# EAGLE board MainBoard 10-11 ver2 (EAGLE 5.10)
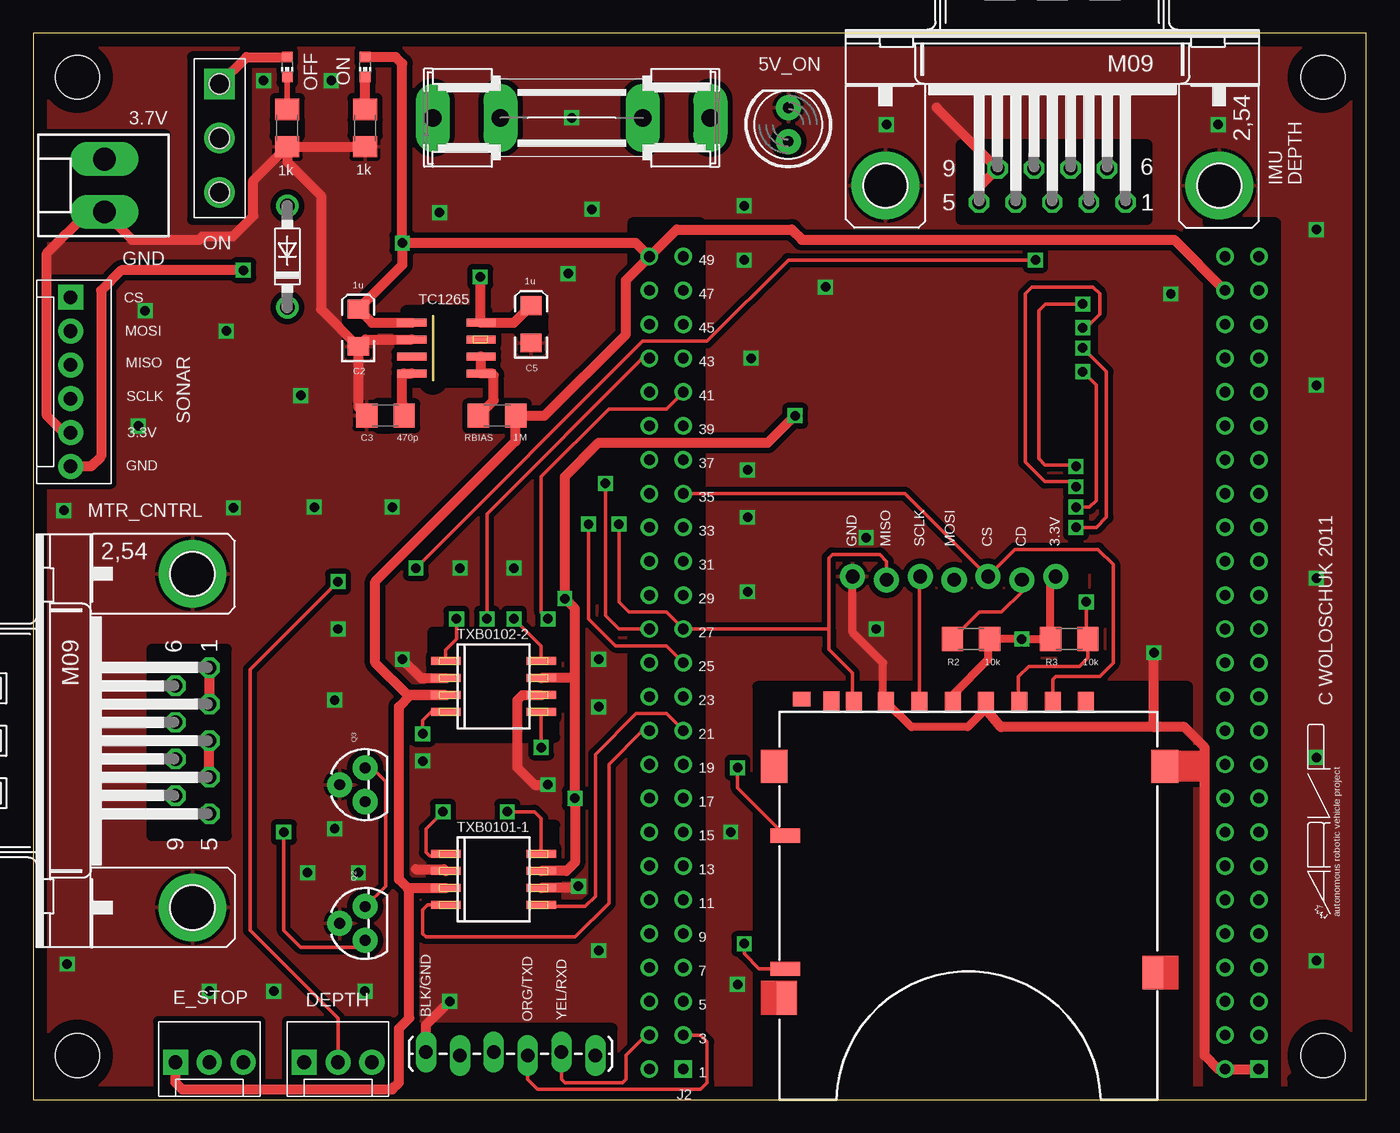
[diagram p0: board, top side]
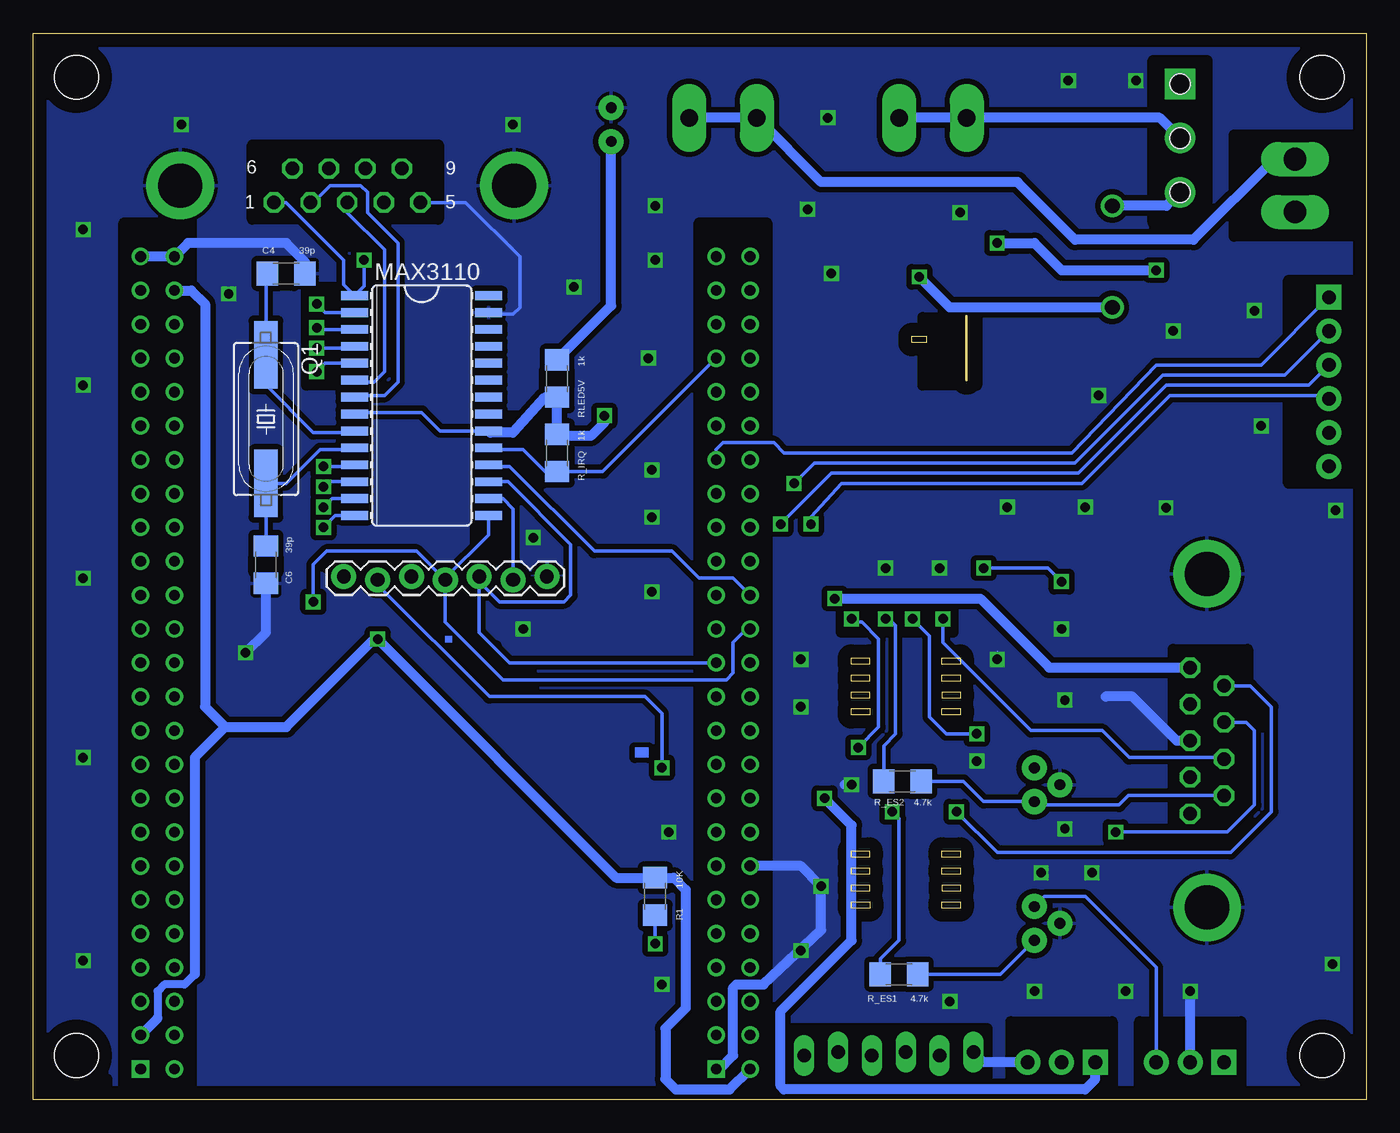
[diagram p1: board, bottom side, seen from below]

Size 100 x 80 mm. Coordinates in mm from the lower left corner, seen from the top.
Outline: 0,0 100,0 100,80 0,80 0,0
Copper layers (1*16): Top 0.035mm / dielectric 1.5mm / Bottom 0.035mm
Design rules "default *": minimum track width 10mil, minimum drill 28mil, track to track 8mil, track to pad 8mil, pad to pad 8mil, via to via 8mil, smd to smd 8mil, copper to edge 40mil, drill to drill 8mil, minimum pad ring 10mil, minimum via ring 8mil, stop-mask expansion 4mil, vias tented up to drill 28mil, thermal gap 10mil
tRestrict: area 30,12.7 to 39.1,20.6; area 30,27.2 to 39.1,35.1; area 0.3,46.2 to 5.8,61.5; area 9.4,0.3 to 17,5.8; area 19,0.3 to 26.7,5.8; area 28.7,1.8 to 43.4,5.3; area 11.9,66 to 16,78.2; area 0,64.8 to 9.9,72.4; area 69.6,66 to 83.6,71.6; area 8.9,19.8 to 14.5,33.8; area 45,0 to 50,65.8; area 88.1,0 to 93.2,65.8; 50 more areas
bRestrict: area 0.3,46.2 to 5.8,61.5; area 9.4,0.3 to 17,5.8; area 19,0.3 to 26.7,5.8; area 28.4,1.8 to 43.2,5.3; area 11.9,65.8 to 16,78; area 0,64.8 to 9.9,72.4; area 69.6,66 to 83.6,71.6; area 8.9,19.8 to 14.5,33.8; area 45,0 to 50,65.8; area 88.1,0 to 93.2,65.8; area 61.7,46.2 to 64.3,51.3; area 5.8,54.1 to 7.1,55.6; 33 more areas

## Footprints (pad centres in the part's own frame; a part is rotated, then mirrored left to right if it is on the bottom)
EIA3216 = smd 1.4 x 1.6: A 1.4,0; C -1.4,0
C1206 = smd 1.6 x 1.8: 1 -1.4,0; 2 1.4,0
DO41-7.6 = drill 1.1 pad 1.7 round: A 3.81,0; C -3.81,0
MOLEX-1X3 = drill 1.016 pad 1.88 square: 1 0,0 | drill 1.016 pad 1.88 round: 2 2.54,0; 3 5.08,0
SHK20L = drill 1.321 pad 2.54 long: 1A -10.414,0; 1B -5.334,0; 2A 10.414,0; 2B 5.334,0
M09HP = drill 1.016 octagon: 1 -5.486,1.27; 2 -2.743,1.27; 3 0,1.27; 4 2.743,1.27; 5 5.486,1.27; 6 -4.115,-1.27; 7 -1.372,-1.27; 8 1.372,-1.27; 9 4.115,-1.27 | drill 3.302 pad 5.08 round: G1 -12.522,0; G2 12.522,0
STAND-OFF = hole 3.302: 0,0
1X07_LOCK = drill 1.016 pad 1.88 round: 1 0,0.127; 2 2.54,-0.127; 3 5.08,0.127; 4 7.62,-0.127; 5 10.16,0.127; 6 12.7,-0.127; 7 15.24,0.127
LED5MM = drill 0.813 pad 1.88 round: A -1.27,0; K 1.27,0
CHIP-LED0603 = smd 0.8 x 0.8: A 0,-0.75; C 0,0.75
SO28L = smd 0.66 x 2.032: 1 -8.255,-5.029; 2 -6.985,-5.029; 3 -5.715,-5.029; 4 -4.445,-5.029; 5 -3.175,-5.029; 6 -1.905,-5.029; 7 -0.635,-5.029; 8 0.635,-5.029; 9 1.905,-5.029; 10 3.175,-5.029; 11 4.445,-5.029; 12 5.715,-5.029; 13 6.985,-5.029; 14 8.255,-5.029; 15 8.255,5.029; 16 6.985,5.029; 17 5.715,5.029; 18 4.445,5.029; 19 3.175,5.029; 20 1.905,5.029; 21 0.635,5.029; 22 -0.635,5.029; 23 -1.905,5.029; 24 -3.175,5.029; 25 -4.445,5.029; 26 -5.715,5.029; 27 -6.985,5.029; 28 -8.255,5.029
MOD5270 = drill 0.8 square: J1[1] -23.368,35.052; J2[1] 19.812,35.052 | drill 0.8 round: J1[2] -20.828,35.052; J1[3] -23.368,32.512; J1[4] -20.828,32.512; J1[5] -23.368,29.972; J1[6] -20.828,29.972; J1[7] -23.368,27.432; J1[8] -20.828,27.432; J1[9] -23.368,24.892; J1[10] -20.828,24.892; J1[11] -23.368,22.352; J1[12] -20.828,22.352; J1[13] -23.368,19.812; J1[14] -20.828,19.812; J1[15] -23.368,17.272; J1[16] -20.828,17.272; J1[17] -23.368,14.732; J1[18] -20.828,14.732; J1[19] -23.368,12.192; J1[20] -20.828,12.192; J1[21] -23.368,9.652; J1[22] -20.828,9.652; J1[23] -23.368,7.112; J1[24] -20.828,7.112; J1[25] -23.368,4.572; J1[26] -20.828,4.572; J1[27] -23.368,2.032; J1[28] -20.828,2.032; J1[29] -23.368,-0.508; J1[30] -20.828,-0.508; J1[31] -23.368,-3.048; J1[32] -20.828,-3.048; J1[33] -23.368,-5.588; J1[34] -20.828,-5.588; J1[35] -23.368,-8.128; J1[36] -20.828,-8.128; J1[37] -23.368,-10.668; J1[38] -20.828,-10.668; J1[39] -23.368,-13.208; J1[40] -20.828,-13.208; J1[41] -23.368,-15.748; J1[42] -20.828,-15.748; J1[43] -23.368,-18.288; J1[44] -20.828,-18.288; J1[45] -23.368,-20.828; J1[46] -20.828,-20.828; J1[47] -23.368,-23.368; J1[48] -20.828,-23.368; J1[49] -23.368,-25.908; J1[50] -20.828,-25.908; J2[2] 22.352,35.052; J2[3] 19.812,32.512; J2[4] 22.352,32.512; J2[5] 19.812,29.972; J2[6] 22.352,29.972; J2[7] 19.812,27.432; J2[8] 22.352,27.432; J2[9] 19.812,24.892; J2[10] 22.352,24.892; J2[11] 19.812,22.352; J2[12] 22.352,22.352; J2[13] 19.812,19.812; J2[14] 22.352,19.812; J2[15] 19.812,17.272; J2[16] 22.352,17.272; J2[17] 19.812,14.732; J2[18] 22.352,14.732; J2[19] 19.812,12.192; J2[20] 22.352,12.192; J2[21] 19.812,9.652; J2[22] 22.352,9.652; J2[23] 19.812,7.112; J2[24] 22.352,7.112; J2[25] 19.812,4.572; J2[26] 22.352,4.572; J2[27] 19.812,2.032; J2[28] 22.352,2.032; J2[29] 19.812,-0.508; J2[30] 22.352,-0.508; J2[31] 19.812,-3.048; J2[32] 22.352,-3.048; J2[33] 19.812,-5.588; J2[34] 22.352,-5.588; J2[35] 19.812,-8.128; J2[36] 22.352,-8.128; J2[37] 19.812,-10.668; J2[38] 22.352,-10.668; J2[39] 19.812,-13.208; J2[40] 22.352,-13.208; J2[41] 19.812,-15.748; J2[42] 22.352,-15.748; J2[43] 19.812,-18.288; J2[44] 22.352,-18.288; J2[45] 19.812,-20.828; J2[46] 22.352,-20.828; J2[47] 19.812,-23.368; J2[48] 22.352,-23.368; J2[49] 19.812,-25.908; J2[50] 22.352,-25.908
1X06_LOCK_LONGPADS = drill 1.016 long: 1 0,0; 2 2.54,-0.254; 3 5.08,0; 4 7.62,-0.254; 5 10.16,0; 6 12.7,-0.254
SM49 = smd 5.08 x 1.778: 1 -4.826,0; 2 4.826,0
TO-92 = drill 0.813 pad 1.88 round: 1 -1.27,0; 2 0,1.905; 3 1.27,0
1206 = smd 1.6 x 1.8: 1 -1.4,0; 2 1.4,0
SWITCH-3PIN-5.47 = drill 1.524 square: P$1 0,0 | drill 1.524 round: P$2 0,-4.064; P$3 0,-8.128 | hole 1.524: 0,0; 0,-4.064; 0,-8.128
MOLEX-1X6 = drill 1.016 pad 1.88 square: 1 0,0 | drill 1.016 pad 1.88 round: 2 2.54,0; 3 5.08,0; 4 7.62,0; 5 10.16,0; 6 12.7,0
SO-08 = smd 0.6 x 2.2: 1 -1.905,-2.6; 2 -0.635,-2.6; 3 0.635,-2.6; 4 1.905,-2.6; 5 1.905,2.6; 6 0.635,2.6; 7 -0.635,2.6; 8 -1.905,2.6
SOP-08 = smd 0.6 x 2.2: 1 -1.905,-3.6; 2 -0.635,-3.6; 3 0.635,-3.6; 4 1.905,-3.6; 5 1.905,3.575; 6 0.635,3.575; 7 -0.635,3.575; 8 -1.905,3.575
SD_CARD = smd 1.2 x 1.5: 1 6.88,12.07; 2 4.38,12.07; 3 1.88,12.07; 4 -0.62,12.07; 5 -3.12,12.07; 6 -5.62,12.07; 7 -8.04,12.07; 8 -9.728,12.09; 9 9.38,12.07 | smd 1.5 x 2.5: 12 -13.1,-10.18; 13 14.402,-8.255 | smd 2 x 2.5: 14 -14,7.22; 15 15.3,7.22 | smd 2.184 x 1.067: CD -13.18,2.02; WP -13.18,-7.98 | smd 1.3 x 1.1: SW -11.938,12.268
KK-156-2 = drill 1.7 pad 2.184 long: 1 -1.98,0; 2 1.98,0

## Placement (x,y rotation side)
C2  1u  [EIA3216]  24.38,57.91 90 top
C3  470p  [C1206]  26.42,51.31 180 top
C4  39p  [C1206]  81.03,61.98 0 bottom
C5  1u  [EIA3216]  37.34,58.17 90 top
C6  39p  [C1206]  82.55,40.13 270 bottom
D1  1N5817FSCT-ND  [DO41-7.6]  19.05,63.25 90 top
DEPTH  [MOLEX-1X3]  20.32,2.79 0 top
E_STOP  [MOLEX-1X3]  10.67,2.79 0 top
F1  1A  [SHK20L]  40.39,73.66 180 top
IMU/DEPTH  [M09HP]  76.45,68.58 180 top
JP2  STAND-OFF  [STAND-OFF]  96.77,76.71 0 top
JP3  STAND-OFF  [STAND-OFF]  3.3,76.71 0 top
JP4  STAND-OFF  [STAND-OFF]  3.3,3.3 0 top
JP5  STAND-OFF  [STAND-OFF]  96.77,3.3 0 top
JP_SD  [1X07_LOCK]  76.71,39.12 0 bottom
LED5V  5mm  [LED5MM]  56.64,73.15 90 top
LEDOFF  [CHIP-LED0603]  19.05,77.47 180 top
LEDON  [CHIP-LED0603]  24.89,77.47 180 top
MAX3110  MAX3110  [SO28L]  70.87,52.07 270 bottom
MOD5270  MOD5270  [MOD5270]  68.58,37.34 180 top
MTRCONTR  [M09HP]  11.94,26.92 270 top
PROG_HEADER  [1X06_LOCK_LONGPADS]  29.46,3.56 0 top
Q1  3.6864MHz  [SM49]  82.55,51.05 270 bottom
Q2  MOSFET-NCHANNELPTH  [TO-92]  24.89,13.21 90 top
Q3  MOSFET-NCHANNELPTH  [TO-92]  24.89,23.62 90 top
R1  10k  [1206]  53.34,15.24 90 bottom
R2  10k  [1206]  70.36,34.54 0 top
R3  10k  [1206]  77.72,34.54 180 top
R_ES1  4.7k  [1206]  35.05,9.4 0 bottom
R_ES2  4.7k  [1206]  34.8,23.88 0 bottom
R_IRQ  1k  [1206]  60.71,48.51 270 bottom
RBIAS  1M  [1206]  34.8,51.31 0 top
RLED5V  1k  [1206]  60.71,54.1 270 bottom
RLEDOFF  1k  [1206]  19.05,72.9 270 top
RLEDON  1k  [1206]  24.89,72.9 270 top
S1  [SWITCH-3PIN-5.47]  13.97,76.2 0 top
SONAR  [MOLEX-1X6]  2.79,60.2 270 top
TC1265  TC1265  [SO-08]  30.99,56.39 270 top
TXB0101-1  TXB0102  [SOP-08]  34.54,16.51 270 top
TXB0102-2  TXB0102  [SOP-08]  34.54,30.99 270 top
U$1  [ARVP]  98.04,13.72 90 top
U$2  SD_CARD  [SD_CARD]  69.6,17.78 0 top
X3  [KK-156-2]  5.33,68.58 90 top

## Library data of the parts
C2 C5 DEPTH E_STOP JP2-JP5 JP_SD LED5V PROG_HEADER Q2 Q3 R1-R3 R_ES1 R_ES2 R_IRQ RBIAS RLED5V RLEDOFF RLEDON SONAR = SparkFun
C3 C4 C6 = rcl
D1 = diode
F1 = fuse
IMU/DEPTH MTRCONTR = con-subd
LEDOFF LEDON = led
MAX3110 MOD5270 S1 TC1265 TXB0101-1 TXB0102-2 U$1 U$2 = ARVP
Q1 = crystal
X3 = con-molex

## Nets
3.3V: C2.A E_STOP.1 JP_SD.1 LEDON.A MOD5270.J1[3] MOD5270.J1[48] MOD5270.J2[2] MOD5270.J2[50] R1.2 R2.2 R3.2 RBIAS.2 SONAR.6 TC1265.1 TXB0101-1.3 TXB0102-2.3 U$2.4
3.7V: F1.1A X3.2
3.7V_AD: C5.A D1.C TC1265.8
5V: DEPTH.1 MAX3110.8 MAX3110.20 MTRCONTR.1 MTRCONTR.2 R_IRQ.1 RLED5V.2 TXB0101-1.7 TXB0102-2.7
CD: JP_SD.2 R2.1 U$2.CD
CS(ADC): MOD5270.J2[37] SONAR.1
CS(MAX3110): MAX3110.18 MOD5270.J2[30]
CS(SD): JP_SD.3 MOD5270.J2[35] U$2.1
DEPTHI/P: DEPTH.2 IMU/DEPTH.1 MAX3110.1
E_STOP: E_STOP.3 Q2.3 Q3.3
GND: C2.C C3.2 C4.2 C5.C C6.2 DEPTH.3 E_STOP.2 IMU/DEPTH.5 IMU/DEPTH.9 IMU/DEPTH.G1 IMU/DEPTH.G2 JP_SD.7 LED5V.K MAX3110.27 MOD5270.J1[1] MOD5270.J1[2] MOD5270.J1[49] MOD5270.J1[50] MOD5270.J2[1] MOD5270.J2[14] MTRCONTR.3 MTRCONTR.4 MTRCONTR.G1 MTRCONTR.G2 PROG_HEADER.1 Q2.2 Q3.2 RLEDOFF.2 RLEDON.2 SONAR.5 TC1265.2 TXB0101-1.2 TXB0101-1.6 TXB0102-2.2 TXB0102-2.6 U$2.3 U$2.6 X3.1
IMU_RX_RS232: IMU/DEPTH.2 MAX3110.7
IMU_TX_RS232: IMU/DEPTH.3 MAX3110.6
IRQ1: MAX3110.19 MOD5270.J2[43] R_IRQ.2
MISO: JP_SD.6 MAX3110.16 MOD5270.J2[27] SONAR.3 U$2.7
MOSI: JP_SD.4 MAX3110.15 MOD5270.J2[28] R3.1 SONAR.2 U$2.2
N$1: F1.2A S1.P$2
N$2: MAX3110.4 MAX3110.14
N$3: MOD5270.J2[46]
N$4: R1.1 U$2.WP
N$5: D1.A S1.P$3
N$6: MAX3110.3 MAX3110.12
N$7: MAX3110.5 MAX3110.13
N$8: LEDON.C RLEDON.1
N$9: MAX3110.2 MAX3110.11
N$10: C3.1 TC1265.4
N$11: LEDOFF.C RLEDOFF.1
N$13: LEDOFF.A S1.P$1
N$14: C6.1 MAX3110.10 Q1.2
N$15: LED5V.A RLED5V.1
N$16: RBIAS.1 TC1265.5 TC1265.6
N$17: C4.1 MAX3110.9 Q1.1
S1-1: MTRCONTR.6 TXB0101-1.1
S1-2: MTRCONTR.8 TXB0102-2.1
S2-1: R_ES1.1 TXB0101-1.8
S2-1-ES: MTRCONTR.7 Q2.1 R_ES1.2
S2-2: R_ES2.1 TXB0102-2.8
S2-2-ES: MTRCONTR.9 Q3.1 R_ES2.2
SCLK: JP_SD.5 MAX3110.17 MOD5270.J2[25] SONAR.4 U$2.5
U0_RXD: MOD5270.J2[3] PROG_HEADER.4
U0_TXD: MOD5270.J2[4] PROG_HEADER.5
U1_MCRX: MOD5270.J2[21] TXB0101-1.5
U1_MCTX: MOD5270.J2[22] TXB0101-1.4
U2_MCRX: MOD5270.J2[41] TXB0102-2.5
U2_MCTX: MOD5270.J2[44] TXB0102-2.4

## Tracks (layer width: path | path; a pad name or v marks a point on that pad's centre or on a via)
3.3V  (via drill 0.71)
  Top 0.254: 68.98,30.37 U$2.4 | R2.2 71.63,34.41
  Top 0.61: 76.32,38.86 R3.2 v74.17,34.54 R2.2 | 68.98,30.37 71.63,33.02 71.63,34.41
  Top 0.762: TC1265.1 25.4,58.29 C2.A 27.69,62.61 v27.69,64.26 | v15.75,62.23 6.6,62.23 5.08,60.71 5.08,48.26 4.32,47.5 SONAR.6 | LEDON.A 27.19,78.22 27.69,77.72 v27.69,64.26 | 76.32,38.86 JP_SD.1 | v27.69,64.26 45.21,64.26 MOD5270.J2[50] | 28.07,15.88 27.43,16.51 27.43,29.46 28.32,30.35 TXB0102-2.3 28.07,30.35 25.65,32.77 25.65,38.86 36.2,49.41 RBIAS.2 38.35,51.31 44.45,57.4 44.45,61.47 MOD5270.J2[50] | 28.07,15.88 TXB0101-1.3 | 28.07,15.88 28.19,15.75 28.19,6.1 27.43,5.33 27.43,1.27 26.92,0.76 11.18,0.76 10.67,1.27 E_STOP.1 | MOD5270.J2[50] 48.26,65.28 56.9,65.28 57.66,64.52 85.6,64.52 MOD5270.J1[48]
  Bottom 0.61: 90.68,6.1 90.68,8.13 90.17,8.64 88.65,8.64 87.88,9.4
  Bottom 0.762: v15.75,62.23 22.86,62.23 24.89,64.26 v27.69,64.26 | 90.68,6.1 MOD5270.J1[3] | 87.88,9.4 87.88,25.65 85.6,27.94 | 85.6,27.94 81.03,27.94 74.42,34.54 v74.17,34.54 56.26,16.64 R1.2 51.95,16.64 51.05,15.75 51.05,6.86 52.58,5.33 52.58,1.52 51.82,0.76 47.75,0.76 MOD5270.J2[2] | 85.6,27.94 87.12,29.46 87.12,59.69 88.14,60.71 MOD5270.J1[48]
3.7V
  Bottom 0.762: X3.2 6.91,70.56 12.95,64.52 21.84,64.52 26.16,68.83 40.89,68.83 45.72,73.66 F1.1A
3.7V_AD  (via drill 0.71)
  Top 0.762: v33.53,61.72 33.53,58.35 TC1265.8 36.06,58.29 C5.A
  Bottom 0.762: D1.C 31.24,59.44 v33.53,61.72
5V  (via drill 0.71)
  Top 0.762: v57.15,51.31 55.12,49.28 42.42,49.28 39.88,46.74 v39.88,37.59 40.64,36.83 40.64,31.75 | MTRCONTR.1 MTRCONTR.2 | TXB0102-2.7 40.51,31.62 40.64,31.75 | TXB0101-1.7 40.01,17.14 40.64,17.78 v40.64,22.61 40.64,31.75
  Bottom 0.254: RLED5V.2 61.6,52.7 | 65.71,50.04 MAX3110.20 69.47,50.16 70.87,51.56 75.77,51.56 MAX3110.8
  Bottom 0.762: 61.6,52.7 64.01,50.04 65.71,50.04 | RLED5V.2 R_IRQ.1 60.58,49.78 58.17,49.78 57.15,50.8 v57.15,51.31 | MTRCONTR.1 23.77,32.41 28.96,37.59 v39.88,37.59 | v40.64,22.61 38.61,20.57 38.61,11.94 43.94,6.6 43.94,1.02 43.69,0.76 21.08,0.76 20.32,1.52 DEPTH.1
CD  (via drill 0.71)
  Top 0.254: JP_SD.2 74.17,38.1 72.64,36.58 70.99,36.58 R2.1 | U$2.CD 52.83,23.38 v52.83,24.89
  Bottom 0.254: v52.83,24.89 52.83,28.96 54.1,30.23 65.79,30.23 74.17,38.61 JP_SD.2
CS(ADC)
  Bottom 0.254: SONAR.1 7.87,55.12 15.75,55.12 22.1,48.51 43.69,48.51 44.45,49.28 48.26,49.28 48.77,48.77 MOD5270.J2[37]
CS(MAX3110)
  Bottom 0.254: MOD5270.J2[30] 47.5,39.12 50.04,39.12 52.07,41.15 57.91,41.15 64.26,47.5 65.71,47.5 MAX3110.18
CS(SD)
  Top 0.254: MOD5270.J2[35] 65.41,45.47 JP_SD.3 73.66,41.27 79.88,41.27 81.03,40.13 81.03,32.77 80.01,31.75 76.71,31.75 76.48,31.52 U$2.1
DEPTHI/P  (via drill 0.71)
  Top 0.254: v75.18,62.99 56.64,62.99 50.55,56.9 45.72,56.9 v28.7,39.88 | v22.86,38.86 16.26,32.26 16.26,12.7 22.86,6.1 DEPTH.2
  Bottom 0.254: IMU/DEPTH.1 81.03,67.31 76.71,62.99 76.71,61.14 MAX3110.1 75.18,61.04 v75.18,62.99 | v28.7,39.88 23.88,39.88 v22.86,38.86
E_STOP
  Top 0.254: Q3.3 25.4,24.89 26.42,23.88 26.42,16 Q2.3
  Bottom 0.254: Q2.3 24.13,15.24 21.08,15.24 15.75,9.91 E_STOP.3
GND  (via drill 0.71)
  Top 0.254: U$2.6 63.75,30.07
  Top 0.406: C2.C 24.89,57.02
  Top 0.61: JP_SD.7 61.47,35.05 63.75,32.77 63.75,30.07 | U$2.3 71.48,29.31 70.1,27.94 65.89,27.94 U$2.6
  Top 0.762: RLEDOFF.2 RLEDON.2 | RLEDOFF.2 16.51,68.96 16.51,66.29 14.99,64.77 12.7,64.77 12.45,64.52 7.42,64.52 X3.1 4.12,66.6 1.02,63.5 1.02,51.31 2.29,50.04 SONAR.5 | 24.89,57.02 TC1265.2 | RLEDOFF.2 19.05,70.36 21.59,67.82 21.59,59.31 C2.C 24.38,51.94 C3.2 | IMU/DEPTH.5 70.97,68.48 IMU/DEPTH.9 67.77,74.42 | TXB0102-2.2 29.08,31.62 v27.69,33.02 | 71.48,29.31 72.59,27.94 84.07,27.94 84.2,28.07 | v84.07,33.53 84.07,28.19 84.2,28.07 | 84.2,28.07 84.33,27.94 86.36,27.94 87.88,26.42 87.88,3.3 88.9,2.29 MOD5270.J1[2] MOD5270.J1[1] | TXB0102-2.6 36.7,30.35 36.32,29.97 36.32,24.89 37.59,23.62 v38.61,23.62 | TXB0101-1.6 40.77,15.88 v40.89,16 | TXB0101-1.2 30.82,17.27 28.7,17.27 | MTRCONTR.4 MTRCONTR.3 | PROG_HEADER.1 29.46,5.59 v31.24,7.37
  Bottom 0.254: IMU/DEPTH.5 67.56,67.31 63.5,63.25 63.5,59.44 64.01,58.93 65.71,58.93 MAX3110.27 | C4.2 79.63,62.86 | 22.43,24.18 Q3.2 | v27.69,33.02 27.69,33.53
  Bottom 0.762: 79.63,62.86 81.03,64.26 88.39,64.26 MOD5270.J1[50] MOD5270.J1[49] | C6.2 82.55,35.05 v84.07,33.53 | v38.61,23.62 39.12,23.62 | DEPTH.3 28.7,2.79 PROG_HEADER.1 | MOD5270.J2[1] 48.51,2.29 47.5,3.3 47.5,8.38 47.24,8.64 45.21,8.64 40.89,12.7 v40.89,16 42.42,17.53 MOD5270.J2[14] | MTRCONTR.3 14.22,26.92 17.53,30.23 19.56,30.23 | E_STOP.2 v13.21,8.13
  other vias: 53.59,38.1 8.38,59.18 14.48,57.66 29.21,25.4 42.42,33.02 42.42,29.46 22.61,29.97 24.38,17.02 20.57,17.02 22.61,20.32 2.54,10.16 18.03,8.13 24.89,8.13 42.42,11.18 7.87,50.55 20.07,52.83 2.29,44.2 15.01,44.4 26.92,44.45 30.48,66.55 41.91,66.8 53.34,67.06 53.34,62.99 53.85,55.63 59.44,60.96 53.59,43.69 53.59,47.24 96.27,10.41 96.27,25.65 96.27,39.12 96.27,53.59 96.27,65.28 85.34,60.45 64.01,73.15 88.9,73.15 40.39,73.66 40.13,61.98 63.25,35.31 32,39.88 36.07,39.88 22.86,35.31 62.48,42.16 21.08,44.45 22.35,76.45 17.27,76.45 52.83,8.64 52.32,20.07
  pour Top (isolate 0.406): 0,80.01 100.08,80.01 100.08,0 0,0
  pour Bottom (isolate 0.406): 0,80.01 100.08,80.01 100.08,0 0,0
IMU_RX_RS232
  Bottom 0.254: IMU/DEPTH.2 79.2,67.26 79.05,67.26 77.72,68.58 75.44,68.58 74.93,68.07 74.93,66.55 72.64,64.26 72.64,53.85 73.66,52.83 75.77,52.83 MAX3110.7
IMU_TX_RS232
  Bottom 0.254: IMU/DEPTH.3 76.45,66.55 73.66,63.75 73.66,54.61 74.42,53.85 75.77,53.85 MAX3110.6
IRQ1
  Bottom 0.254: MAX3110.19 65.71,48.77 63.25,48.77 61.59,47.11 R_IRQ.2 57.28,47.11 MOD5270.J2[43]
MISO  (via drill 0.71)
  Top 0.254: JP_SD.6 64.01,40.39 63.5,40.89 59.94,40.89 59.69,40.64 59.69,35.31 | 59.69,35.31 59.69,33.78 61.47,32 61.47,29.94 U$2.7 | 59.69,35.31 MOD5270.J2[27] 47.5,36.58 44.7,36.58 43.94,37.34 v43.94,43.18
  Bottom 0.254: SONAR.3 4.32,53.59 14.99,53.59 21.59,46.99 40.13,46.99 v43.94,43.18 | MAX3110.16 64.77,45.09 64.01,44.32 JP_SD.6
MOSI  (via drill 0.71)
  Top 0.254: U$2.2 73.91,29.91 73.91,31.75 74.68,32.51 78.49,32.51 79.12,33.15 R3.1 78.99,34.67 v78.99,37.34 | v42.93,46.23 42.93,36.32 43.94,35.31 MOD5270.J2[28]
  Bottom 0.254: SONAR.2 6.1,54.36 15.24,54.36 21.84,47.75 41.4,47.75 v42.93,46.23 | JP_SD.4 69.09,37.59 | MOD5270.J2[28] 46.48,35.31 47.5,34.29 47.5,32 48.01,31.5 64.77,31.5 69.09,35.81 JP_SD.4 | v78.99,37.34 78.99,40.13 77.98,41.15 71.25,41.15 JP_SD.4 | JP_SD.4 69.09,39.12 65.84,42.37 MAX3110.15
N$1
  Bottom 0.762: S1.P$2 15.49,73.66 F1.2A 35.31,73.66
N$2  (via drill 0.71)
  Top 0.254: v78.74,56.39 80.52,54.61 80.52,43.69 79.76,42.93 v78.23,42.93
  Bottom 0.254: MAX3110.4 76.02,56.39 v78.74,56.39 | v78.23,42.93 77.34,43.81 MAX3110.14
N$4  (via drill 0.71)
  Top 0.254: U$2.WP 54.46,9.8 53.34,10.92 v53.34,11.68
  Bottom 0.254: v53.34,11.68 R1.1
N$5
  Bottom 0.762: S1.P$3 14.99,67.06 D1.A
N$6  (via drill 0.71)
  Top 0.254: v78.74,57.91 78.99,57.91 80.01,58.93 80.01,60.45 79.5,60.96 74.93,60.96 74.42,60.45 74.42,47.83 MAX3110.12 77.85,46.35 v78.23,45.97
  Bottom 0.254: MAX3110.3 78.61,57.78 v78.74,57.91 | v78.23,45.97 77.85,46.35 MAX3110.12
N$7  (via drill 0.71)
  Top 0.254: v78.23,44.45 79.25,44.45 79.76,44.96 79.76,53.59 v78.74,54.61
  Bottom 0.254: v78.74,54.61 78.11,55.24 MAX3110.5 | MAX3110.13 77.6,45.09 v78.23,44.45
N$8
  Top 0.762: RLEDON.1 LEDON.C
N$9  (via drill 0.71)
  Top 0.254: v78.74,59.69 75.95,59.69 75.44,59.18 75.44,48.08 MAX3110.11 78.11,47.62 v78.23,47.5
  Bottom 0.254: MAX3110.2 78.11,59.05 v78.74,59.69 | v78.23,47.5 76.02,47.5 MAX3110.11
N$10
  Top 0.762: C3.1 27.69,52.2 27.69,54.36 27.81,54.48 TC1265.4
N$11
  Top 0.406: RLEDOFF.1 LEDOFF.C
N$13
  Top 0.762: S1.P$1 15.99,78.22 LEDOFF.A
N$14
  Bottom 0.254: C6.1 Q1.2 81.03,46.23 78.49,48.77 76.02,48.77 MAX3110.10
N$15
  Bottom 0.762: LED5V.A 56.64,59.57 RLED5V.1
N$16
  Top 0.762: TC1265.6 TC1265.5 34.42,54.48 34.54,54.36 34.54,52.45 RBIAS.1
N$17
  Bottom 0.254: C4.1 82.55,61.85 Q1.1 82.55,53.59 78.99,50.04 76.02,50.04 MAX3110.9
S1-1  (via drill 0.71)
  Top 0.254: v30.73,21.59 29.46,20.32 29.46,18.54 29.72,18.29 30.82,18.29 TXB0101-1.1 31.07,18.29
  Bottom 0.254: MTRCONTR.6 8.69,31.04 7.11,29.46 7.11,21.59 10.16,18.54 27.69,18.54 v30.73,21.59
S1-2  (via drill 0.71)
  Top 0.254: TXB0102-2.1 30.94,33.74 31.75,34.54 v31.75,36.07
  Bottom 0.254: 10.52,25.4 MTRCONTR.8 10.77,25.65 17.78,25.65 19.81,27.69 25.15,27.69 31.75,34.29 v31.75,36.07
S2-1  (via drill 0.71)
  Top 0.254: v35.56,21.59 37.59,21.59 38.1,21.08 38.1,18.43 TXB0101-1.8
  Bottom 0.254: R_ES1.1 36.45,10.54 35.05,11.94 35.05,21.08 v35.56,21.59
S2-1-ES  (via drill 0.71)
  Top 0.254: v18.8,20.07 18.8,12.7 20.07,11.43 24.38,11.43 Q2.1
  Bottom 0.254: MTRCONTR.7 8.99,28.3 8.38,27.69 8.38,22.1 10.41,20.07 v18.8,20.07 | R_ES1.2 27.43,9.4 Q2.1
S2-2  (via drill 0.71)
  Top 0.254: v36.07,36.07 38.1,34.04 38.1,32.91 TXB0102-2.8
  Bottom 0.254: R_ES2.1 36.2,26.54 35.31,27.43 35.31,35.56 35.81,36.07 v36.07,36.07
S2-2-ES
  Bottom 0.254: MTRCONTR.9 17.83,22.81 18.54,22.1 24.64,22.1 Q3.1 28.7,22.35 30.23,23.88 R_ES2.2
SCLK  (via drill 0.71)
  Top 0.254: U$2.5 66.48,39.17 JP_SD.5 | v41.66,43.18 41.66,36.07 43.69,34.04 47.5,34.04 MOD5270.J2[25]
  Bottom 0.254: SONAR.4 3.05,52.83 14.73,52.83 21.34,46.23 39.37,46.23 41.66,43.69 v41.66,43.18 | MAX3110.17 64.39,46.35 59.69,41.66 59.69,37.85 60.2,37.34 65.02,37.34 66.55,38.86 JP_SD.5 66.55,35.05 64.26,32.77 MOD5270.J2[25]
U0_RXD
  Top 0.254: PROG_HEADER.4 37.08,1.52 37.85,0.76 50.04,0.76 50.55,1.27 50.55,4.32 50.04,4.83 MOD5270.J2[3]
U0_TXD
  Top 0.254: MOD5270.J2[4] 45.97,4.83 44.45,3.3 44.45,1.52 44.2,1.27 39.88,1.27 39.62,1.52 PROG_HEADER.5
U1_MCRX
  Top 0.254: MOD5270.J2[21] 47.5,28.96 45.21,28.96 42.16,25.91 42.16,15.24 41.4,14.48 38.25,14.48 TXB0101-1.5
U1_MCTX
  Top 0.254: TXB0101-1.4 29.59,14.61 29.21,14.22 29.21,12.45 29.46,12.19 40.64,12.19 43.18,14.73 43.18,25.15 45.72,27.69 MOD5270.J2[22]
U2_MCRX  (via drill 0.71)
  Top 0.254: MOD5270.J2[41] 47.5,51.82 43.18,51.82 38.1,46.74 38.1,36.58 v38.61,36.07 | v38.1,26.42 38.1,29.06 TXB0102-2.5
  Bottom 0.254: v38.61,36.07 38.61,35.81 37.85,35.81 36.58,34.54 36.58,27.94 v38.1,26.42
U2_MCTX  (via drill 0.71)
  Top 0.254: TXB0102-2.4 29.84,29.08 29.21,28.45 v29.21,27.43 | v34.04,36.07 34.04,43.94 45.72,55.63 MOD5270.J2[44]
  Bottom 0.254: v29.21,27.43 31.5,27.43 32.77,28.7 32.77,34.8 v34.04,36.07
(copper drawn outside any net)
  shapes: Bottom area x2, Top area x1

## Text on the board
tPlace: OFF | ON | 5V_ON | 3.7V | 1k | 1k | IMU | DEPTH | ON | GND | CS | MOSI | SONAR | MISO | SCLK | 3.3V | GND | MTR_CNTRL | GND | MISO | SCLK | MOSI | CS | CD | 3.3V | R2 | 10k | R3 | 10k | C WOLOSCHUK 2011 | BLK/GND | ORG/TXD | YEL/RXD | E_STOP | DEPTH
bPlace: 9 | 6 | 5 | 1 | 39p | C4 | 1k | RLED5V | 1k | R_IRQ | 39p | C6 | 4.7k | R_ES2 | 10K | R1 | 4.7k | R_ES1